# Altium PCB Board_1.pcbdoc
Units mm, origin at the board's own origin, x right, y up, seen from the top; angles counter-clockwise.
Board outline 95.18 x 66.69 mm, 2 copper layers (Top Layer, Bottom Layer); 39 components, 37 nets, 124 pads, 38 vias.
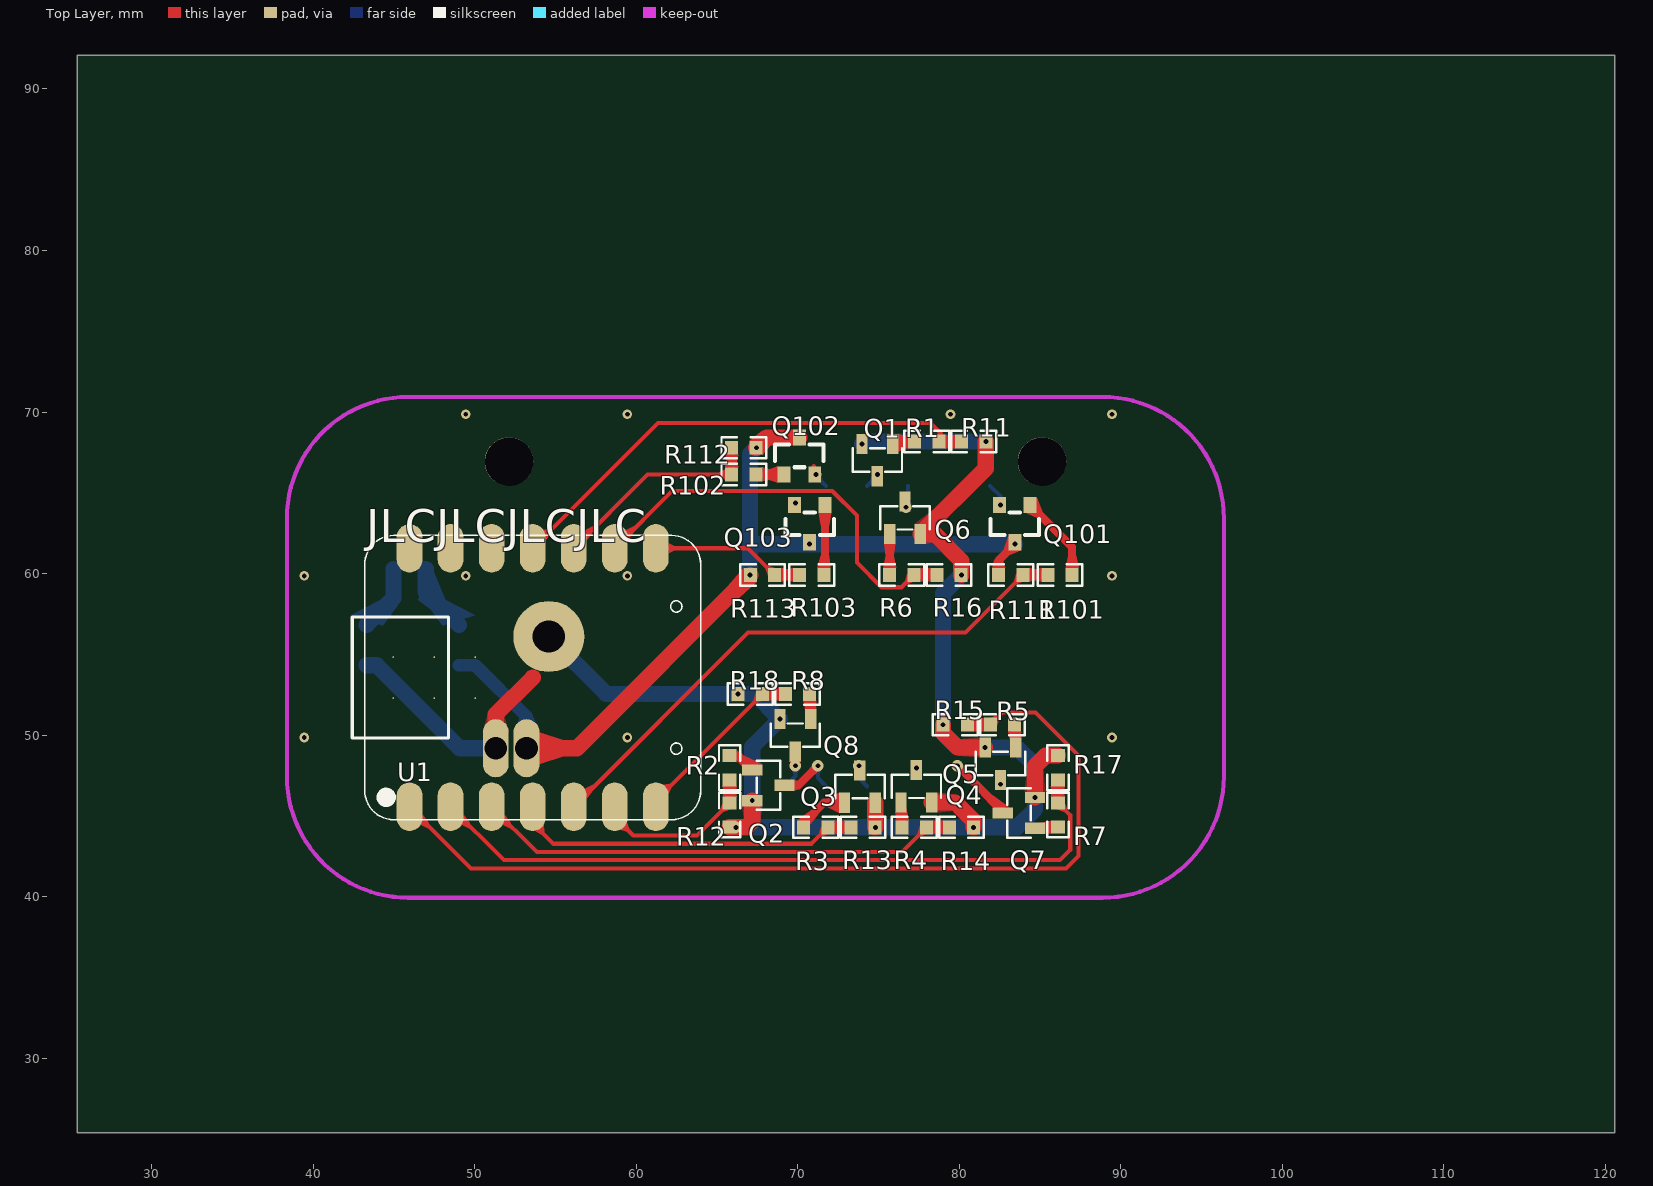
[diagram p0: Top Layer view]
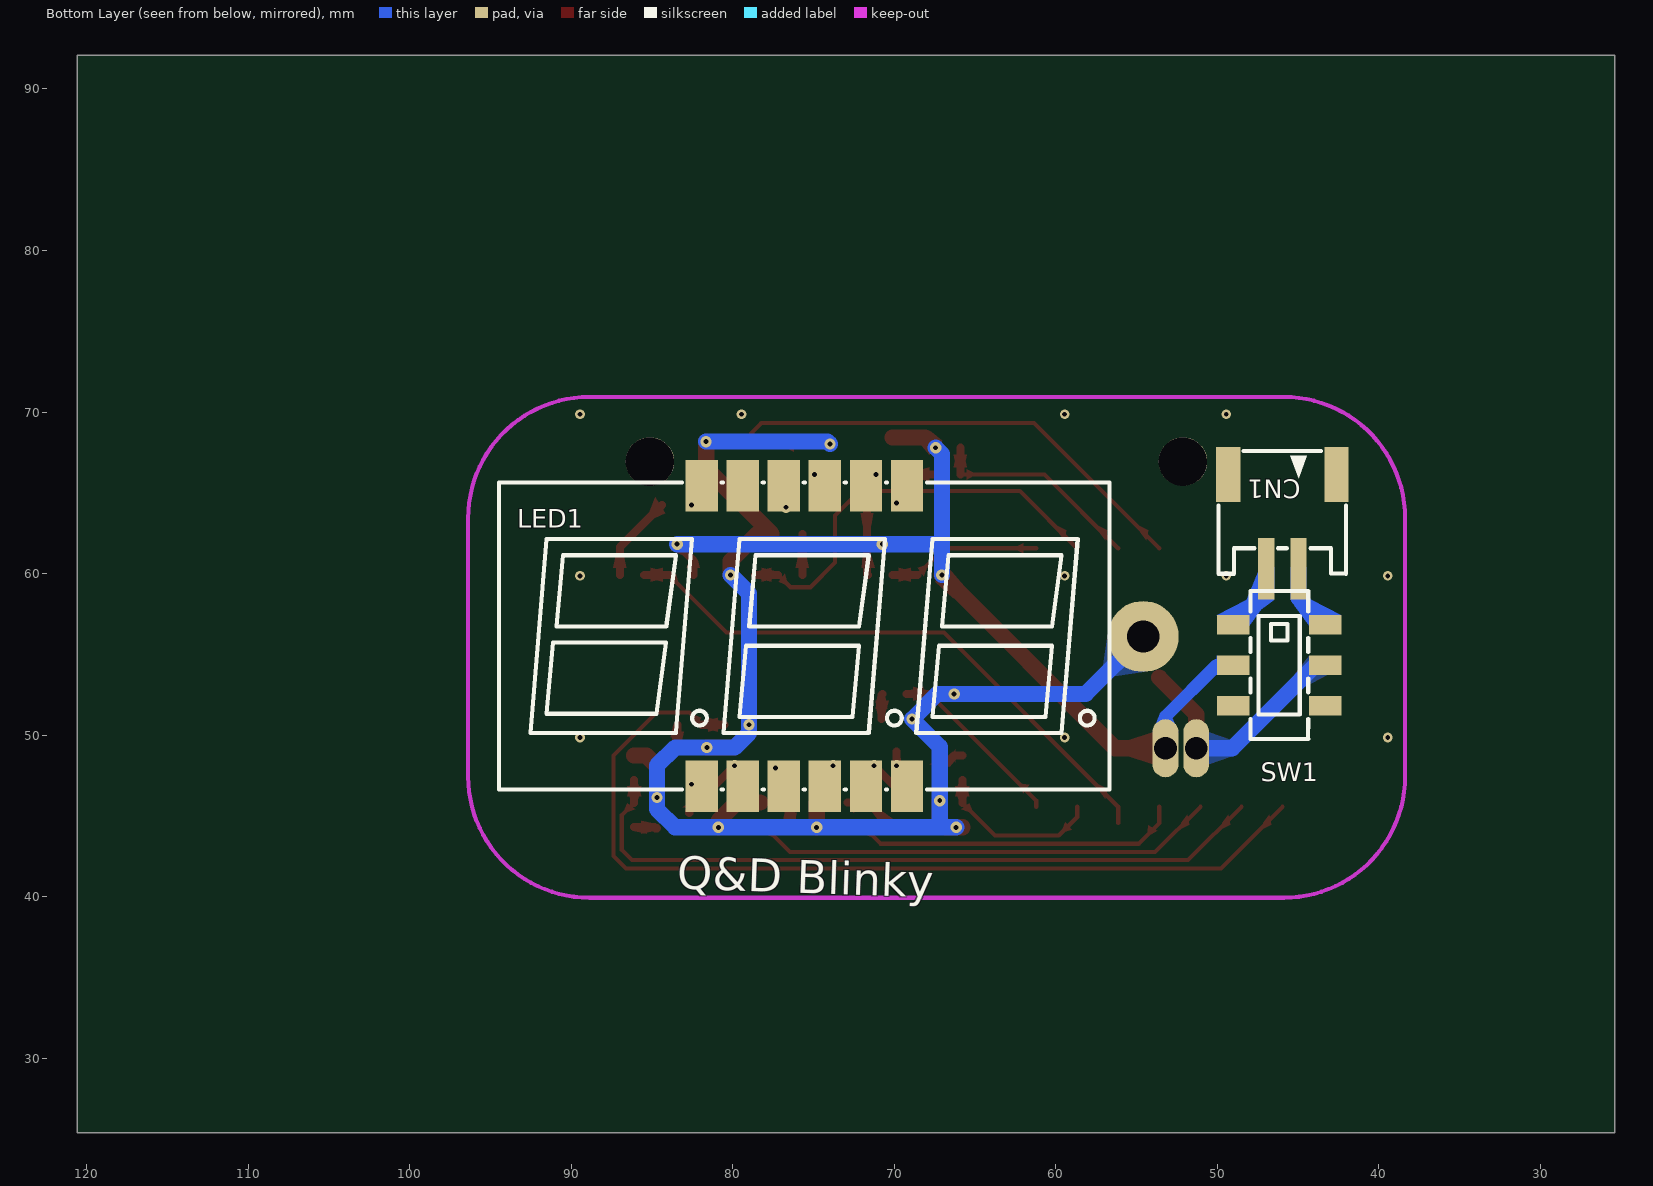
[diagram p1: Bottom Layer view, seen from below]

## Layer stack, top to bottom
Top Layer: signal copper (thickness not stored)
Dielectric: dielectric 0.32, FR-4, Dk 4.8
Bottom Layer: signal copper (thickness not stored)

## Board outline
120.577,25.4 25.4,25.4 25.4,92.087 120.577,92.087

## Components (designator, comment, footprint, x,y, rotation, side; value= is the part's Value field where it differs from the comment)
CN1 "S2B-PH-SM4-TB(LF)(SN)" CONN-SMD_P2.00_S2B-PH-SM4-TB-LF-SN 45.974,63.218 r180 bottom
LED1 "SLS0563DRA1GD" LED-SEG-SMD_12P-L37.8-W19.0-P2.54-LS19.0-BL 75.565,56.134 r0 bottom
Q1 "2N7002" SOT-23-3_L2.9-W1.3-P1.90-LS2.4-BR 74.93,67.028 r90 top
Q2 "2N7002" SOT-23-3_L2.9-W1.3-P1.90-LS2.4-BR 68.183,46.896 r180 top
Q3 "2N7002" SOT-23-3_L2.9-W1.3-P1.90-LS2.4-BR 73.848,46.819 r270 top
Q4 "2N7002" SOT-23-3_L2.9-W1.3-P1.90-LS2.4-BR 77.343,46.835 r270 top
Q5 "2N7002" SOT-23-3_L2.9-W1.3-P1.90-LS2.4-BR 82.55,48.232 r90 top
Q6 "2N7002" SOT-23-3_L2.9-W1.3-P1.90-LS2.4-BR 76.642,63.456 r270 top
Q7 "2N7002" SOT-23-3_L2.9-W1.3-P1.90-LS2.4-BR 83.693,45.184 r0 top
Q8 "2N7002" SOT-23-3_L2.9-W1.3-P1.90-LS2.4-BR 69.85,49.994 r90 top
Q101 "AO3401A" SOT-23_L2.9-W1.3-P1.90-LS2.4-BR 83.439,63.091 r90 top
Q102 "AO3401A" SOT-23_L2.9-W1.3-P1.90-LS2.4-BR 70.104,67.282 r270 top
Q103 "AO3401A" SOT-23_L2.9-W1.3-P1.90-LS2.4-BR 70.739,63.091 r90 top
R1 "220kΩ" R0603 77.987,68.171 r180 top
R2 "220kΩ" R0603 65.786,47.978 r90 top
R3 "220kΩ" R0603 71.12,44.295 r180 top
R4 "220kΩ" R0603 77.216,44.295 r180 top
R5 "220kΩ" R0603 82.677,50.645 r0 top
R6 "220kΩ" R0603 76.445,59.916 r180 top
R7 "220kΩ" R0603 86.106,45.057 r270 top
R8 "220kΩ" R0603 69.986,52.55 r0 top
R11 "1kΩ" R0603 80.891,68.171 r180 top
R12 "1kΩ" R0603 65.786,45.057 r90 top
R13 "1kΩ" R0603 74.041,44.295 r180 top
R14 "1kΩ" R0603 80.137,44.295 r180 top
R15 "1kΩ" R0603 79.756,50.645 r0 top
R16 "1kΩ" R0603 79.367,59.916 r180 top
R17 "1kΩ" R0603 86.106,47.978 r270 top
R18 "1kΩ" R0603 67.056,52.55 r0 top
R101 "220kΩ" R0603 86.233,59.916 r180 top
R102 "220kΩ" R0603 66.666,66.139 r180 top
R103 "220kΩ" R0603 70.866,59.916 r180 top
R111 "220kΩ" R0603 83.185,59.916 r180 top
R112 "220kΩ" R0603 66.666,67.79 r0 top
R113 "220kΩ" R0603 67.818,59.916 r180 top
SW1 "MST22D18G2 125" SW-SMD_MST22D18G2 46.172,54.328 r90 bottom
U1 "XIAO ESP32-C3" MOD-14_22-SMD-L21-W18-P2.54-LS16-TR-EP_XIAO_ESP32C3 53.594,53.566 r180 top
? "" ? 67.501,75.976 r0 top
? "" ? 102.491,55.471 r0 top

## Footprints (in the part's own frame and the unit in brackets; to place one, negate y for a bottom-side part, rotate by r counter-clockwise, add the part's x,y. Pads: shape width x height; smd on the part's side, far side on the other; paste and mask are expansions set on the pad)
CONN-SMD_P2.00_S2B-PH-SM4-TB-LF-SN [mm]
  rect 1x3.8 smd paste+0 mask+0.051: 1(1,-2.925) 2(-1,-2.925)
  rect 1.5x3.4 smd paste+0 mask+0.051: 3(-3.35,2.925) 4(3.35,2.925)
  silkscreen extent -3.95,-3.22 3.95,4.37
LED-SEG-SMD_12P-L37.8-W19.0-P2.54-LS19.0-BL [mm]
  rect 2x3.2 smd paste+0 mask+0.051: 1(6.35,9.3) 2(3.81,9.3) 3(1.27,9.3) 4(-1.27,9.3) 5(-3.81,9.3) 6(-6.35,9.3) 7(-6.35,-9.3) 8(-3.81,-9.3) 9(-1.27,-9.3) 10(1.27,-9.3) 11(3.81,-9.3) 12(6.35,-9.3)
  silkscreen extent -18.9,-9.5 18.9,9.51
MOD-14_22-SMD-L21-W18-P2.54-LS16-TR-EP_XIAO_ESP32C3 [mm]
  oval 1.6x3 smd paste+0 mask+0.051: 1(7.62,8) 2(5.08,8) 3(2.54,8) 4(0,8) 5(-2.54,8) 6(-5.08,8) 7(-7.62,8) 8(-7.62,-8) 9(-5.08,-8) 10(-2.54,-8) 11(0,-8) 12(2.54,-8) 13(5.08,-8) 14(7.62,-8)
  oval 1.6x3.6 hole 1.4 paste+0 mask+0.051: BAT+(0.381,4.377) BAT-(2.286,4.377)
  round 4.4 hole 2 paste+0 mask+0.051: Thermal(-1,-2.54)
  round 0.1 smd paste+0: TP1(6.096,-1.27) TP2(3.556,1.27) TP3(8.636,1.27) TP4(3.556,-1.27) TP5(8.636,-1.27) TP6(6.096,1.27)
  silkscreen extent -10.4,-8.8 11.18,8.8
R0603 [mm]
  rect 0.806x0.864 smd paste-100 mask+0.051: 1(-0.753,0) 2(0.753,0)
  silkscreen extent -1.39,-0.66 1.39,0.66
SOT-23-3_L2.9-W1.3-P1.90-LS2.4-BR [mm]
  rect 1.25x0.7 smd paste+0 mask+0.051: 1(1,-0.95) 2(1,0.95) 3(-1,0)
  silkscreen extent -0.73,-1.53 0.73,1.53
SOT-23_L2.9-W1.3-P1.90-LS2.4-BR [mm]
  rect 1x0.8 smd paste+0 mask+0.051: 1(1.15,-0.95) 2(1.15,0.95) 3(-1.15,0)
  silkscreen extent -0.7,-1.5 0.7,1.5
SW-SMD_MST22D18G2 [mm]
  rect 1.2x2 smd paste+0 mask+0.051: 1(2.5,-2.85) 2(0,-2.85) 3(-2.5,-2.85) 4(2.5,2.85) 5(0,2.85) 6(-2.5,2.85)
  silkscreen extent -4.57,-1.8 4.6,1.78
? [mm]

## Free pads (board coordinates)
  round 3 hole 3 unplated paste+0: ""(52.128,66.937) ""(85.128,66.937)

## Via types
v1: diameter 0.7, hole 0.305, Top Layer to Bottom Layer, tented both sides, 27 vias
v2: diameter 0.61, hole 0.305, Top Layer to Bottom Layer, tented both sides, 11 vias

## Nets (pads, with @x,y where several pads share a name; then routed paths per layer and width w, separated by ;. In a path a pad name is that pad's centre, name@x,y a point inside that pad or via, vN(x,y) a via of type N, cw(c..) or ccw(c..) an arc to the next point about the centre after c; other vN are vias at no path point)
BAT+: CN1.2 SW1.4 | length 4.3
  Bottom Layer w1: CN1.2 46.975,58.877 SW1.4
BAT-: CN1.1 SW1.1 | length 4.1
  Bottom Layer w1: SW1.1 44.973,58.481 CN1.1
GND: Q1.2 Q2.2 Q3.2 Q4.2 Q5.2 Q6.2 Q7.2 Q8.2 R11.1 R12.1 R13.1 R14.1 R15.1 R16.1 R17.1 R18.1 SW1.2 U1.BAT- U1.Thermal | length 112.9
  Top Layer w1: U1.BAT- 51.308,51.28 53.594,53.566 ; R12.1 66.81,44.302 67.183,44.676 v1(67.183,45.946) ; R13.1 74.798,44.297 Q3.2 ; Q4.2 79.741,45.834 80.264,45.311 80.891,44.683 v1(80.89,44.295) ; R15.1 79.002,50.129 79.898,49.232 v1(81.6,49.232) ; R16.1@80.119,59.916 80.119,60.787 78.486,62.456 Q6.2 81.643,66.507 R11.1@81.643,68.171 ; v1(84.694,46.134) 84.694,48.089 85.336,48.732 R17.1@86.106,48.732
  Bottom Layer w1: SW1.2 43.942,54.328 49.08,49.189 U1.BAT- ; U1.Thermal 58.151,52.55 v1(66.294,52.55) 67.343,52.55 v1(68.9,50.994) ; v1(68.9,50.994) 67.183,49.277 v1(67.183,45.946) 67.183,44.295 v1(66.167,44.295) v1(74.803,44.295) v1(80.89,44.295) 83.566,44.295 84.694,45.422 v1(84.694,46.134) 84.694,48.12 83.551,49.232 v1(81.6,49.232) ; v1(73.98,68.028) 74.123,68.171 v1(81.661,68.171) ; v1(80.137,59.916) 78.994,58.773 v1(78.994,50.645) 78.994,50.129 79.891,49.232 v1@81.592,49.232
  other v2: 39.45,49.864 59.45,49.864 89.45,49.864 39.45,59.864 49.45,59.864 59.45,59.864 89.45,59.864 49.45,69.864 59.45,69.864 79.45,69.864 89.45,69.864
LED1_1: LED1.1 Q5.3 | length 0.3
  Top Layer w0.5: v1(82.55,46.962) Q5.3
LED1_2: LED1.2 Q7.3 | length 4.1
  Top Layer w0.5: v1(79.883,48.105) 82.692,45.295 Q7.3
LED1_3: LED1.3 Q4.3
  other v1: 77.343,47.978
LED1_4: LED1.4 Q3.3 | length 1.8
  Top Layer w0.5: v1(73.787,48.105) 73.848,48.044 Q3.3
  Bottom Layer w0.254: v1(73.787,48.105) 73.787,47.343 LED1.4
LED1_5: LED1.5 Q2.3 | length 4
  Top Layer w0.5: Q2.3 70.038,46.896 v1(71.247,48.105)
  Bottom Layer w0.254: v1(71.247,48.105) 71.247,47.343 LED1.5
LED1_6: LED1.6 Q8.3 | length 2.4
  Top Layer w0.5: v1(69.85,48.105) Q8.3
  Bottom Layer w0.254: LED1.6 69.85,47.469 v1(69.85,48.105)
LED1_7: LED1.7 Q103.2
  other v1: 69.85,64.361
LED1_8: LED1.8 Q102.2 | length 1.6
  Top Layer w0.254: 70.993,66.647 70.993,66.266 v1(71.12,66.139) 71.112,66.131 Q102.2
  Bottom Layer w0.254: v1(71.12,66.139) 71.12,66.069 LED1.8
LED1_9: LED1.9 Q1.3 | length 1.1
  Top Layer w0.254: Q1.3 v1(74.93,66.139)
  Bottom Layer w0.254: LED1.9 74.93,66.069 v1(74.93,66.139)
LED1_10: LED1.10 Q6.3 | length 2.4
  Top Layer w0.254: Q6.3 76.642,64.173 v1(76.708,64.107) 76.835,64.234 Q6.3@76.835,64.361
  Bottom Layer w0.254: LED1.10@76.835,64.361 LED1.10@76.835,64.234 ; LED1.10 LED1.10@76.835,64.234 ; LED1.10@76.835,64.234 v1(76.708,64.107) LED1.10@76.835,64.234
LED1_12: LED1.12 Q101.2 | length 1.5
  Bottom Layer w0.254: LED1.12 82.55,64.799 v1(82.55,64.234)
Q1_1: Q1.1 R1.2 | length 1.4
  Top Layer w0.5: Q1.1 76.022,68.171 R1.2
Q2_1: Q2.1 R2.2 | length 1.8
  Top Layer w0.5: R2.2@65.786,48.732 66.302,48.732 67.183,47.851 Q2.1
Q3_1: Q3.1 R3.2 | length 3.3
  Top Layer w0.5: R3.2 70.366,44.556 71.628,45.819 Q3.1
Q4_1: Q4.1 R4.2 | length 1.6
  Top Layer w0.5: Q4.1 76.462,45.765 R4.2
Q5_1: Q5.1 R5.2 | length 1.4
  Top Layer w0.5: R5.2 83.431,49.301 Q5.1
Q6_1: Q6.1 R6.2 | length 2.5
  Top Layer w0.5: R6.2 Q6.1
Q7_1: Q7.1 R7.2 | length 1.4
  Top Layer w0.5: Q7.1 84.77,44.234 84.839,44.302 R7.2
Q8_1: Q8.1 R8.2 | length 1.6
  Top Layer w0.5: R8.2 70.8,52.489 Q8.1
Q101_1: Q101.1 R101.1 | length 5.4
  Top Layer w0.5: Q101.1 86.987,61.643 R101.1
R1_1: R1.1 R11.2 U1.11 | length 30.7
  Top Layer w0.254: U1.11@53.594,61.567 61.341,69.314 78.232,69.314 78.867,68.679 78.74,68.552 R1.1
  Top Layer w0.5: R1.1 R11.2
R2_1: R2.1 R12.2 U1.6 | length 10.5
  Top Layer w0.254: U1.6 58.674,44.93 59.817,43.787 63.762,43.787 R12.2@65.786,45.811
  Top Layer w0.5: R12.2@65.786,45.811 R2.1
R3_1: R3.1 R13.2 U1.4 | length 21.7
  Top Layer w0.254: U1.4 53.594,44.549 54.864,43.279 70.858,43.279 R3.1
  Top Layer w0.5: R3.1 R13.2
R4_1: R4.1 R14.2 U1.3 | length 30.1
  Top Layer w0.254: U1.3 53.848,42.771 76.446,42.771 R4.1
  Top Layer w0.5: R4.1 R14.2
R5_1: R5.1 R15.2 U1.1 | length 57.8
  Top Layer w0.254: U1.1 49.784,41.755 86.614,41.755 87.376,42.517 87.376,48.74 84.709,51.407 82.685,51.407 R5.1
  Top Layer w0.5: R15.2 R5.1
R6_1: R6.1 R16.2 U1.9 | length 25.9
  Top Layer w0.254: U1.9@58.674,61.567 62.23,65.123 72.136,65.123 73.66,63.599 73.66,60.678 75.184,59.154 76.436,59.154 R6.1
  Top Layer w0.5: R6.1 R16.2
R7_1: R7.1 R17.2 U1.2 | length 44.6
  Top Layer w0.254: U1.2 51.816,42.263 86.233,42.263 86.868,42.898 86.868,45.049 R7.1@86.106,45.811
  Top Layer w0.5: R7.1@86.106,45.811 R17.2
R8_1: R8.1 R18.2 U1.7 | length 11.1
  Top Layer w0.254: U1.7 61.214,45.953 R18.2
  Top Layer w0.5: R18.2 R8.1
R101_2: R101.2 R111.1 U1.5 | length 36.3
  Top Layer w0.254: U1.5@56.134,44.549 U1.5 66.929,56.36 80.383,56.36 R111.1
  Top Layer w0.5: R111.1 R101.2
R102_1: Q102.1 R102.1 | length 1.7
  Top Layer w0.5: R102.1 67.427,66.131 Q102.1
R103_1: Q103.1 R103.1 | length 4.4
  Top Layer w0.5: R103.1 71.689,59.984 Q103.1
R112_1: R102.2 R112.1 U1.10 | length 13.3
  Top Layer w0.254: U1.10@56.134,61.567 60.706,66.139 R102.2
  Top Layer w0.5: R102.2 R112.1
R113_1: R103.2 R113.1 U1.8 | length 9.6
  Top Layer w0.254: U1.8@61.214,61.567 66.921,61.567 R113.1
  Top Layer w0.5: R113.1 R103.2
SW_BAT+: Q101.3 Q102.3 Q103.3 R111.2 R112.2 R113.2 SW1.5 U1.BAT+ | length 57.5
  Top Layer w0.5: R111.2 82.431,60.812 v1(83.439,61.821) Q101.3
  Top Layer w1: U1.BAT+ 56.337,49.189 R113.2 ; R112.2 v1(67.437,67.79) 68.08,68.432 Q102.3
  Bottom Layer w0.8: SW1.5 50.038,54.328 53.213,51.153 U1.BAT+
  Bottom Layer w1: v1(67.437,67.79) 67.056,67.409 v1(67.056,59.916) 67.056,61.821 v1(70.739,61.821) v1(83.439,61.821)
pads on no net: CN1.3 CN1.4 LED1.11 SW1.3 SW1.6 U1.12 U1.13 U1.14 U1.TP1 U1.TP2 U1.TP3 U1.TP4 U1.TP5 U1.TP6

## Polygon pours and split planes (outlines as drawn)
GND on Bottom Layer (solid): 38.227,70.965 38.354,71.092 96.774,71.092 96.52,70.838 96.52,39.596 38.1,39.596
GND on Top Layer (solid): 38.227,70.965 38.354,71.092 96.774,71.092 96.774,70.838 96.52,39.596 38.1,39.596

## Keep-outs
Keep-Out Layer:
  lines w0.254: 38.378,47.437 ccw(c45.878,47.437) 45.878,39.937 ; 38.378,63.437 cw(c45.878,63.437) 45.878,70.937 ; 88.878,39.937 ccw(c88.878,47.437) 96.378,47.437 ; 88.878,70.937 cw(c88.878,63.437) 96.378,63.437

## Other copper
Top Layer:
  region net LED1_6: 70.113,48.336 69.587,48.336 69.6,48.581 70.1,48.581
  region net LED1_5: 71.269,47.755 70.898,48.127 70.733,47.945 71.087,47.591
  region net LED1_2: 80.232,48.127 79.861,47.755 80.043,47.591 80.397,47.945
  region net LED1_8: 71.311,66.432 70.805,66.292 70.866,66.563 71.12,66.633
  region net LED1_10: 76.923,64.383 76.407,64.285 76.515,64.432 76.769,64.48
  region net SW_BAT+: 83.461,61.471 83.09,61.843 82.925,61.661 83.279,61.307
  region net R1_1: 79.735,67.739 79.735,68.603 78.985,68.421 78.985,67.921
  region net R2_1: 65.354,46.213 66.218,46.213 66.036,46.963 65.536,46.963
  region net R2_1: 65.866,45.407 65.354,45.782 65.21,45.415 65.418,45.263
  region net R3_1: 72.884,43.863 72.884,44.727 72.134,44.545 72.134,44.045
  region net R4_1: 78.98,43.863 78.98,44.727 78.23,44.545 78.23,44.045
  region net R5_1: 80.913,51.077 80.913,50.213 81.663,50.395 81.663,50.895
  region net R6_1: 78.211,59.484 78.211,60.348 77.461,60.166 77.461,59.666
  region net R7_1: 86.538,46.821 85.674,46.821 85.856,46.071 86.356,46.071
  region net R8_1: 67.782,52.118 67.406,52.63 67.262,52.181 67.415,51.974
  region net R8_1: 68.213,52.982 68.213,52.118 68.963,52.3 68.963,52.8
  region net Q1_1: 76.23,68.653 76.23,67.546 76.98,67.921 76.98,68.421
  region net Q7_1: 85.318,44.584 85.318,43.884 86.068,44.052 86.068,44.552
  region net LED1_2: 82.068,45.534 83.079,45.534 82.058,46.284 81.35,46.284
  region net Q8_1: 70.45,51.619 71.15,51.619 71.05,52.369 70.55,52.369
  region net LED1_6: 70.2,48.369 69.5,48.369 69.6,48.105 70.1,48.105
  region net SW_BAT+: 83.839,61.441 83.039,62.273 82.753,61.488 83.1,61.128
  region net Q101_1: 84.789,64.741 84.181,63.741 84.861,63.416 85.128,63.855
  region net LED1_8: 70.675,66.632 71.31,66.632 71.12,66.647 70.866,66.647
  region net R102_1: 68.754,65.632 68.754,66.632 68.004,66.381 68.004,65.881
  region net R103_1: 72.089,63.741 71.289,63.741 71.439,62.991 71.939,62.991
  region net Q1_1: 76.83,67.739 76.83,68.603 76.08,68.421 76.08,67.921
  region net R1_1: 79.108,68.603 78.957,68.589 78.915,68.603 78.473,68.603 78.687,68.679 78.915,68.603 79.108,68.603
  region net R1_1: 79.143,67.739 79.143,68.603 79.893,68.421 79.893,67.921
  region net Q7_1: 85.674,43.9 85.674,44.707 84.924,44.552 84.924,44.052
  region net R7_1: 86.538,45.782 86.026,45.407 86.474,45.263 86.682,45.415
  region net R7_1: 86.538,46.213 85.674,46.213 85.856,46.963 86.356,46.963
  region net Q8_1: 71.142,52.118 70.336,52.118 70.55,51.368 71.05,51.368
  region net R8_1: 68.829,52.982 68.829,52.118 68.079,52.3 68.079,52.8
  region net R101_2: 85.076,59.484 85.076,60.348 84.326,60.166 84.326,59.666
  region net Q101_1: 87.39,60.348 86.583,60.348 86.737,61.098 87.237,61.098
  region net R112_1: 65.51,65.821 65.51,66.456 65.129,66.266 65.129,66.012
  region net R112_1: 65.51,66.571 66.316,66.571 66.163,67.321 65.663,67.321
  region net R102_1: 67.823,65.707 67.823,66.571 68.573,66.381 68.573,65.881
  region net R113_1: 69.709,59.484 69.709,60.348 68.959,60.166 68.959,59.666
  region net R103_1: 72.023,60.348 71.216,60.348 71.439,61.098 71.939,61.098
  region net SW_BAT+: 82.028,60.348 82.835,60.348 82.681,60.812 82.181,60.812
  region net R101_2: 83.911,59.484 83.535,59.996 83.391,59.547 83.544,59.34
  region net R101_2: 84.342,59.484 84.342,60.348 85.092,60.166 85.092,59.666
  region net SW_BAT+: 67.016,68.222 67.823,67.358 68.421,68.067 67.726,68.786
  region net R112_1: 65.51,67.358 66.316,67.358 66.163,66.608 65.663,66.608
  region net SW_BAT+: 67.468,59.484 66.661,60.348 65.661,59.221 66.344,58.489
  region net R113_1: 68.168,59.836 68.544,60.348 68.177,60.491 68.024,60.284
  region net R113_1: 68.975,59.484 68.975,60.348 69.725,60.166 69.725,59.666
  region net Q2_1: 66.558,48.052 67.8,48.196 66.618,48.769 66.125,48.555
  region net LED1_5: 69.808,47.246 69.808,46.546 70.038,46.646 70.038,47.146
  region net Q3_1: 72.548,45.194 72.548,46.444 71.798,46.069 71.798,45.569
  region net Q4_1: 76.743,45.21 76.043,45.21 76.212,44.46 76.712,44.46
  region net Q2_1: 66.218,49.134 66.218,48.328 66.302,48.482 66.302,48.982
  region net R2_1: 65.354,46.821 66.218,46.821 66.036,46.071 65.536,46.071
  region net Q3_1: 69.963,44.727 70.77,44.478 71.271,45.108 70.73,45.275
  region net R3_1: 71.846,43.863 71.47,44.375 71.326,43.926 71.479,43.719
  region net R3_1: 72.277,43.863 72.277,44.727 73.027,44.545 73.027,44.045
  region net Q4_1: 76.059,44.727 76.866,44.727 76.712,45.477 76.212,45.477
  region net R4_1: 77.942,43.863 77.566,44.375 77.422,43.926 77.575,43.719
  region net R4_1: 78.373,43.863 78.373,44.727 79.123,44.545 79.123,44.045
  region net Q5_1: 83.15,49.857 83.85,49.857 83.681,50.607 83.181,50.607
  region net Q6_1: 76.042,61.831 75.342,61.831 75.442,61.081 75.942,61.081
  region net Q5_1: 83.834,50.213 83.027,50.213 83.181,49.463 83.681,49.463
  region net R5_1: 81.951,51.077 82.327,50.565 82.471,51.013 82.318,51.22
  region net R5_1: 81.52,51.077 81.52,50.213 80.77,50.395 80.77,50.895
  region net Q6_1: 75.289,60.348 76.095,60.348 75.942,61.098 75.442,61.098
  region net R6_1: 77.167,59.484 76.795,59.999 76.651,59.548 76.801,59.339
  region net R6_1: 77.602,59.484 77.602,60.348 78.352,60.166 78.352,59.666
  region net R3_1: 54.263,44.428 53.733,44.078 54.1,43.863 54.316,44.006
  region net R4_1: 51.854,45.082 51.742,44.457 52.235,44.204 52.235,44.563
  region net R7_1: 49.314,45.082 49.202,44.457 49.695,44.204 49.695,44.563
  region net R5_1: 46.774,45.082 46.662,44.457 47.155,44.204 47.155,44.563
  region net R101_2: 56.823,46.672 56.934,46.047 57.315,46.566 57.315,46.925
  region net R2_1: 59.429,44.601 58.999,44.135 59.408,44.016 59.58,44.203
  region net R8_1: 62.001,46.407 61.65,46.936 62.072,46.991 62.215,46.775
  region net R1_1: 54.282,62.674 54.394,62.049 54.775,62.568 54.775,62.927
  region net R112_1: 56.822,62.674 56.934,62.049 57.315,62.568 57.315,62.927
  region net R6_1: 59.362,62.674 59.474,62.049 59.855,62.568 59.855,62.927
  region net R113_1: 62.014,61.884 62.014,61.249 62.395,61.44 62.395,61.694
  region net SW_BAT+: 54.013,50.189 54.013,48.189 55.513,48.689 55.513,49.689
Bottom Layer:
  region net LED1_6: 70.113,47.873 69.587,47.873 69.723,47.628 69.977,47.628
  region net LED1_5: 71.51,47.873 70.984,47.873 71.12,47.628 71.374,47.628
  region net LED1_4: 74.05,47.873 73.524,47.873 73.66,47.628 73.914,47.628
  region net LED1_8: 71.062,65.794 71.47,66.125 71.52,65.849 71.321,65.688
  region net LED1_9: 74.58,66.125 74.988,65.794 74.729,65.688 74.53,65.849
  region net LED1_10: 76.517,64.4 77.023,64.26 76.962,64.531 76.708,64.601
  region net LED1_12: 82.813,64.465 82.287,64.465 82.423,64.71 82.677,64.71
  region net SW_BAT+: 50.022,53.728 50.022,54.928 50.038,54.728 50.038,53.928
  region net BAT-: 42.322,57.428 44.322,56.76 45.236,58.036 44.176,58.39
  region net BAT+: 48.022,56.76 50.022,57.428 48.168,58.39 47.108,58.036
  region net BAT+: 47.474,60.122 46.474,58.393 47.673,57.47 48.191,58.366
  region net SW_BAT+: 54.013,50.189 52.413,50.189 52.813,51.153 53.613,51.153

## Silkscreen, mask and mechanical layers (free items; w line width, h text height)
Top Overlay:
  text "JLCJLCJLCJLC" at 43.299,61.948 h2.03
Bottom Overlay:
  text "Q&D Blinky" at 83.467,40.485 h2.03 r2